# Altium PCB PCB1.pcbdoc
Units mil, origin at the board's own origin, x right, y up, seen from the top; angles counter-clockwise.
Board outline 4170 x 2675 mil, 2 copper layers (Top Layer, Bottom Layer); 21 components, 43 nets, 108 pads, 2 vias.
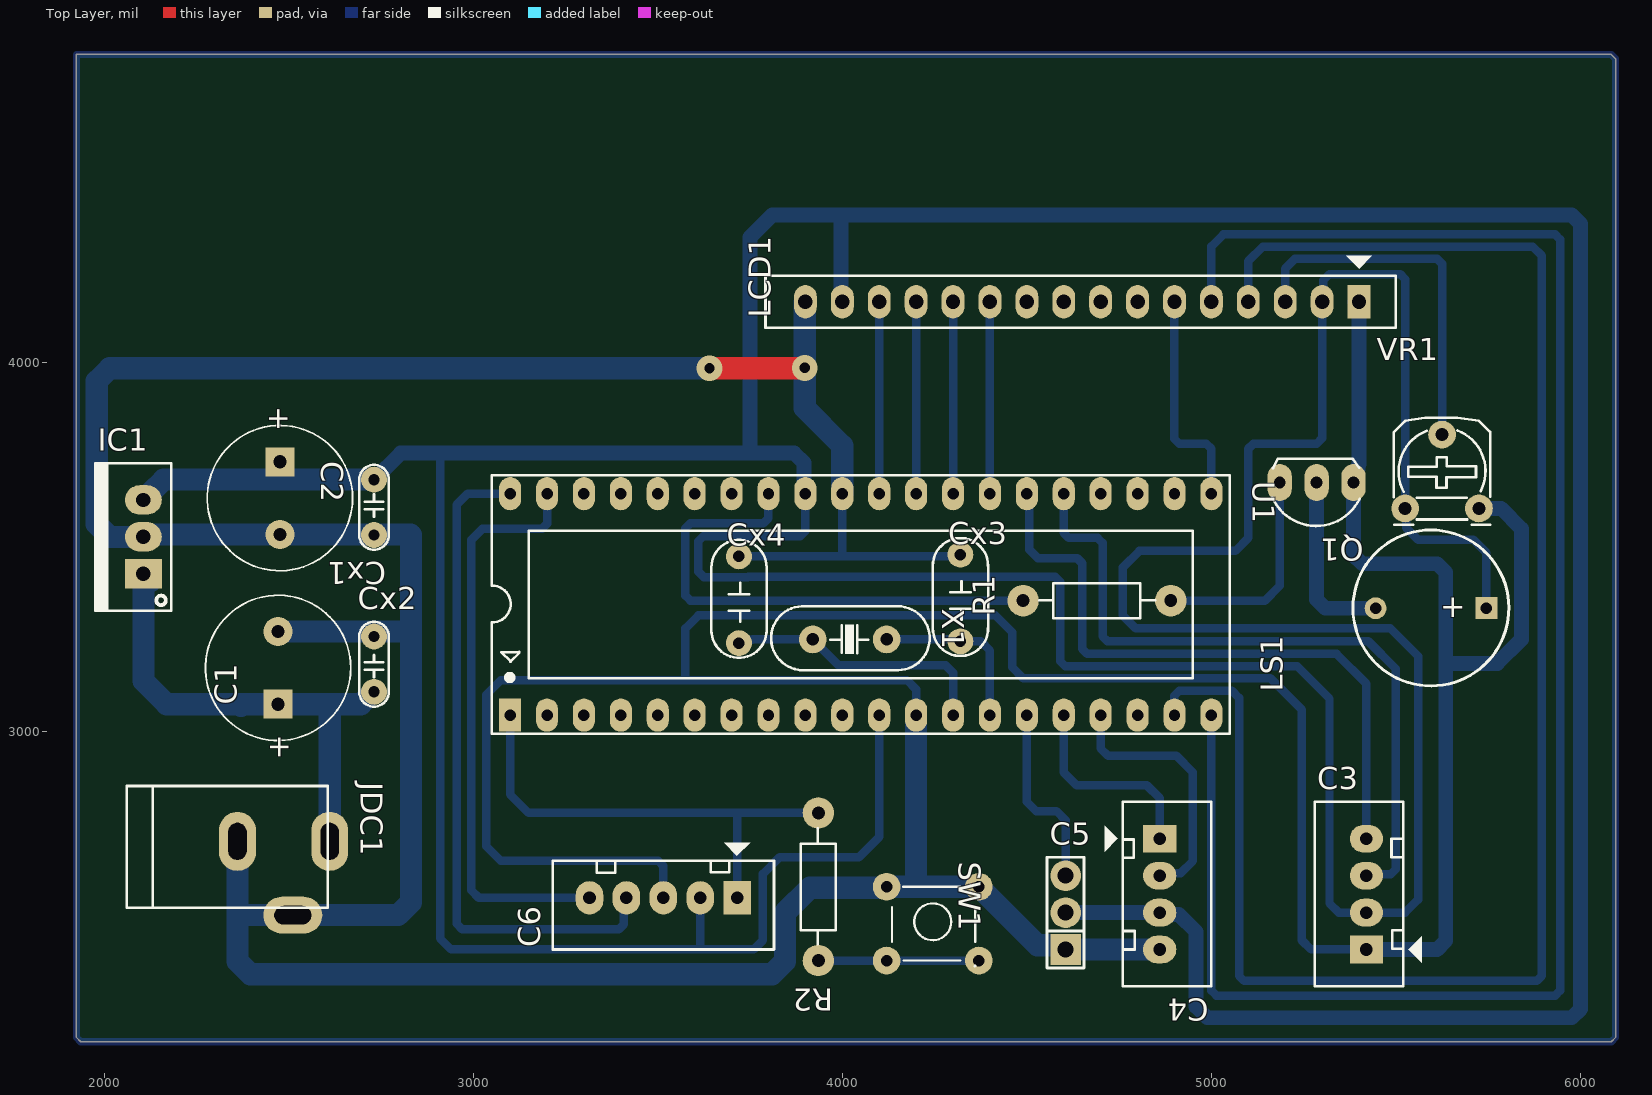
[diagram p0: Top Layer view]
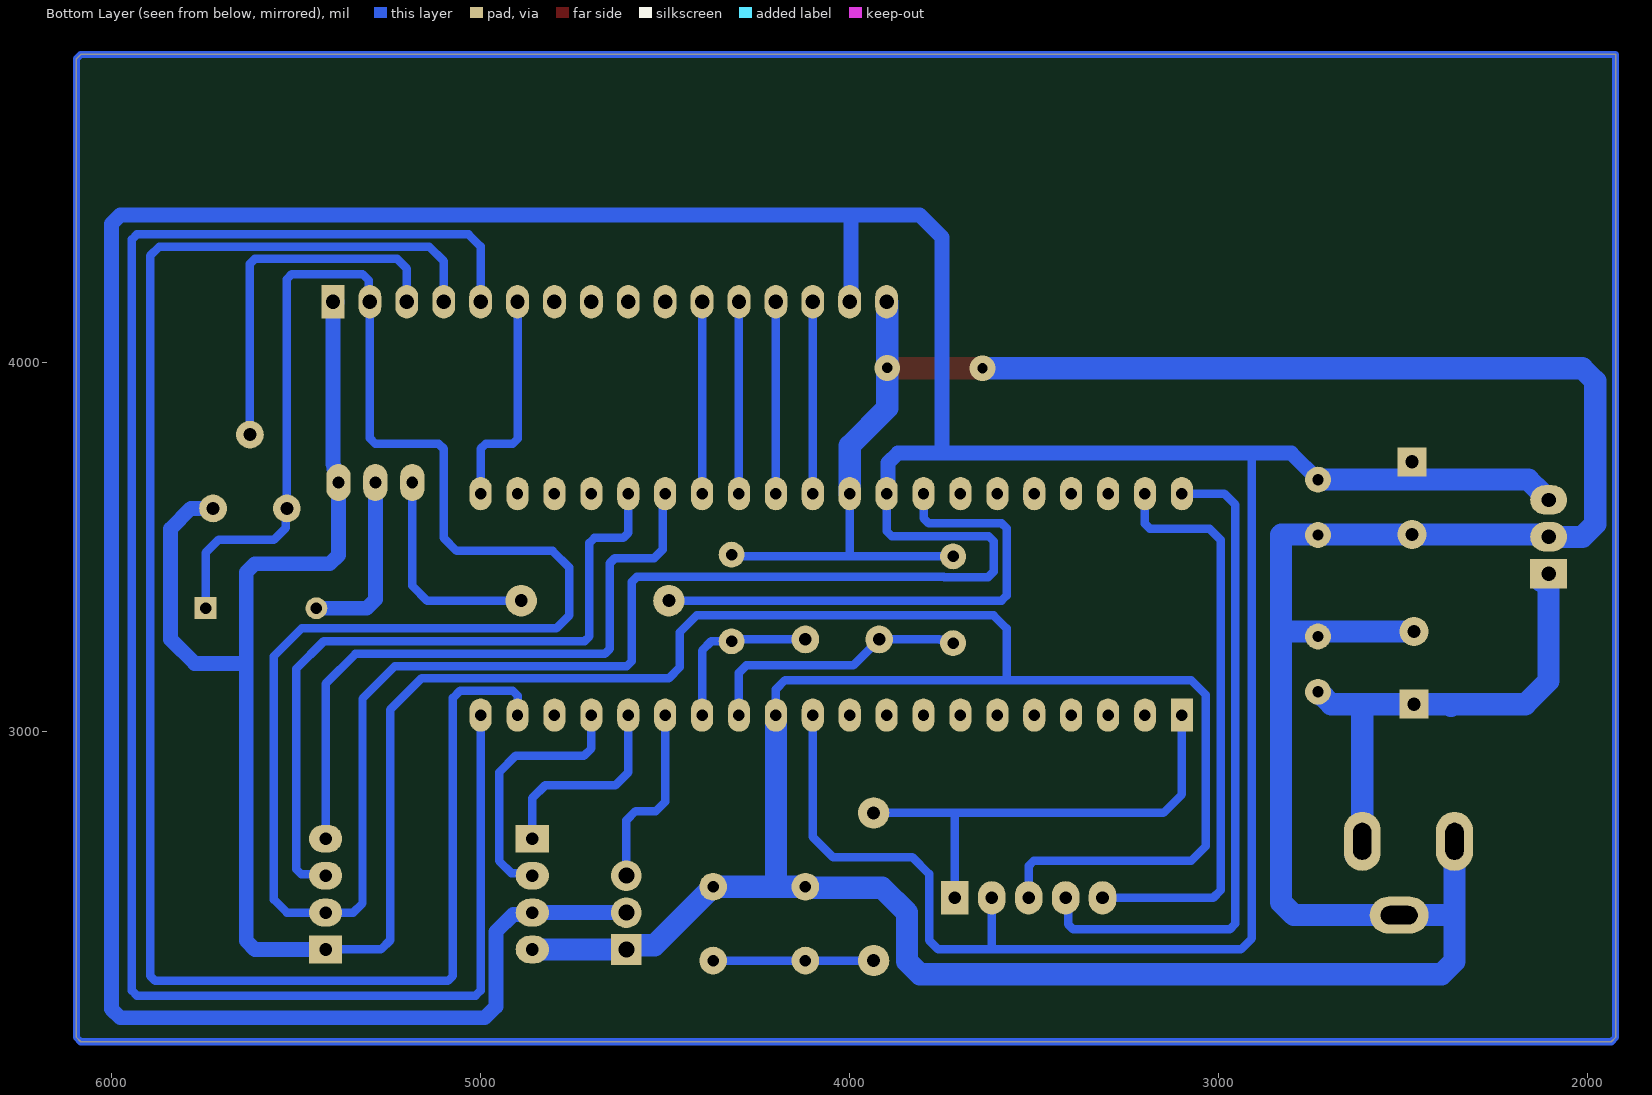
[diagram p1: Bottom Layer view, seen from below]
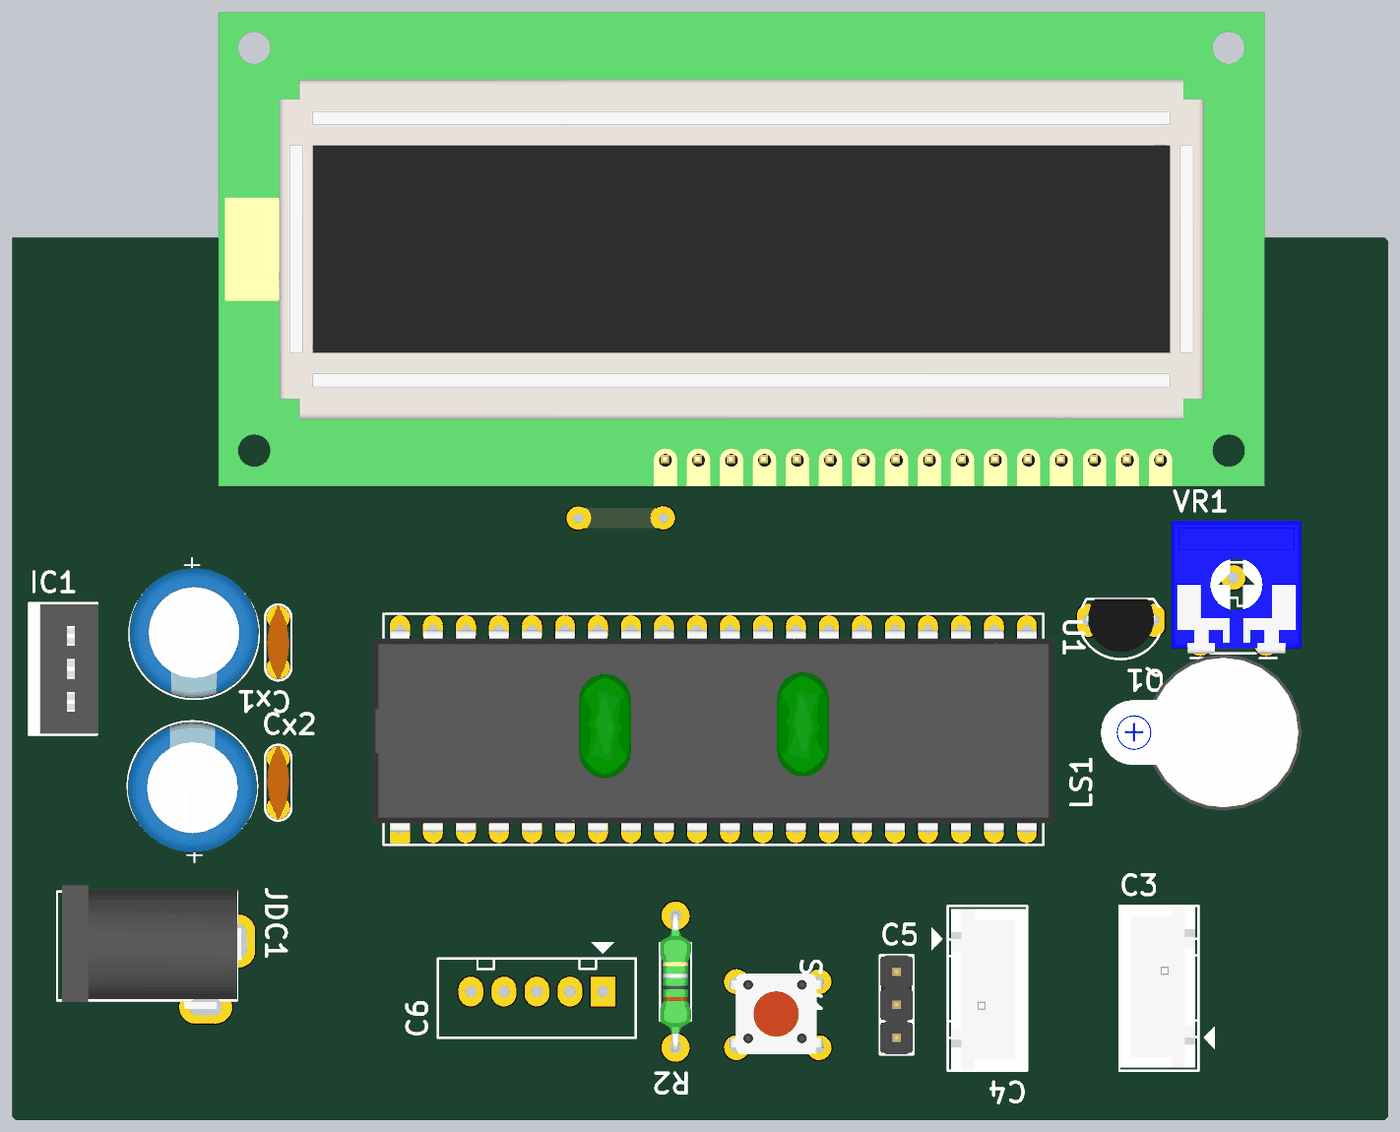
[diagram p2: 3D render of the assembled board from above, using the file's embedded part models]

## Layer stack, top to bottom
Top Solder: solder mask 0.4, Solder Resist, Dk 3.5
Top Layer: signal copper 1.4
Dielectric 1: dielectric 12.6, FR-4, Dk 4.8
Bottom Layer: signal copper 1.4
Bottom Solder: solder mask 0.4, Solder Resist, Dk 3.5

## Board outline
1936.72,2160 1925,2171.72 1925,4835 6083.28,4835 6095,4823.28 6095,2171.72 6083.28,2160

## Design rules (kind name [scope] priority, off if disabled: settings)
Clearance [All] p1: gap=10 ignorepadtopadclearanceinfootprint=FALSE except(0: Arc-Hole Track-Hole SMDPad-Hole THPad-Hole Via-Hole Fill-Hole Poly-Hole Region-Hole Text-Hole)
PolygonConnect [All] p1: connectstyle=Relief reliefconductorwidth=10 reliefentries=4 polygonreliefangle="90 Angle" airgapwidth=10
RoutingVias [All] p1: holewidth=28 width=50 viastyle="Through Hole" minholewidth=28 minwidth=50 maxholewidth=28 maxwidth=50
SolderMaskExpansion [All] p1: expansion=4 istentingtop=FALSE
Width [All] p1: maxlimit=60 minlimit=23 preferedwidth=40
30 further rules are at their usual default settings.

## Classes and differential pairs
component class Duy_Hung: C1 C2 C4 C5 C6 Cx1 Cx2 Cx3 IC1 JDC1 LCD1 LS1 Q1 R1 R2 SW1 U1 VR1 X1

## Components (designator, comment, footprint, x,y, rotation, side; value= is the part's Value field where it differs from the comment)
C1 "CN-ALU-DIP" CA-ALU-10BL 2471.19,3172.99 r90 top value=104
C2 "CN-ALU-DIP" CA-ALU-10BL 2476.19,3632.99 r270 top value=104
C3 "Header4" Header4 5420,2410 r90 top
C4 "Header4" Header4 4860,2710 r270 top
C5 "JP3" JP3-D1T 4605,2410 r90 top
C6 "Header5" Header5 3715,2550 r180 top
Cx1 "100pF" CN1.5 2731.19,3612.99 r270 top value=33pF
Cx2 "100pF" CN1.5 2731.19,3177.99 r90 top value=33pF
Cx3 "100pF" CN2.5 4320,3355 r90 top value=33pF
Cx4 "100pF" CN2.5 3720,3350 r90 top value=33pF
IC1 "LM78xx" TO220-123 2106.19,3427.99 r90 top
JDC1 "Jac DC" DC0 2486.19,2602.99 r0 top
LCD1 "LCD 16x2A" LCD16X2N 5400,4165 r180 top value=LCD16x2A
LS1 "Speaker" SPEAKER 5745,3335 r180 top
Q1 "2SC1815" TO92-123 5285,3675 r180 top value=C1815
R1 "Res" RES-1/4W 4675,3360 r180 top
R2 "Res" RES-1/4W 3930,2565 r270 top
SW1 "SW" SW2-DIP 4120,2580 r0 top value="Button chip 4 pin"
U1 "PIC16F887-PU" DIP40/W0.6 3100,3045 r0 top
VR1 "10K" VR-S2 5525,3605 r0 top value="Volume 50k"
X1 "12Mhz" XT2 4020,3250 r0 top value=4Mhz

## Footprints (in the part's own frame and the unit in brackets; to place one, negate y for a bottom-side part, rotate by r counter-clockwise, add the part's x,y. Pads: shape width x height; smd on the part's side, far side on the other; paste and mask are expansions set on the pad)
CA-ALU-10BL [mm] "Polarized capacitors, Aluminum Electrolytic Capacitors, 2-Leads, Body 10x20x5x0.6"
  rect 2x2 hole 0.9: 1(-2.5,0)
  round 2 hole 0.9: 2(2.5,0)
  silkscreen extent -5,-5 5,5, body extent -5.13,-5 4.88,5, height 16.2
CN1.5 [mil]
  round 70 hole 31: 1(-70,0) 2(80,0)
  silkscreen extent -110,-40 120,40, body extent -110,-33 120,33, height 235
CN2.5 [mil] "Tu pin to pin 250mil"
  round 70 hole 31: 1(-110,0) 2(125,0)
  silkscreen extent -150,-75 170,75, body extent -152,-80 162,77, height 539
DC0 [mil] "Jac DC input"
  oval 100x160 hole 50 slot 100 at 90 deg: 1(125,100) 2(-125,100)
  oval 160x100 hole 50 slot 100 at 0 deg: 3(25,-100)
  silkscreen extent -425,-80 120,250, body extent -410,-105 134,269, height 434
DIP40/W0.6 [mil] "40 PIN, W 600mil, Pin to pin 100mil"
  rect 60x90 hole 31: 1(0,0)
  oval 60x90 hole 31: 2(100,0) 3(200,0) 4(300,0) 5(400,0) 6(500,0) 7(600,0) 8(700,0) 9(800,0) 10(900,0) 11(1000,0) 12(1100,0) 13(1200,0) 14(1300,0) 15(1400,0) 16(1500,0) 17(1600,0) 18(1700,0) 19(1800,0) 20(1900,0) 21(1900,600) 22(1800,600) 23(1700,600) 24(1600,600) 25(1500,600) 26(1400,600) 27(1300,600) 28(1200,600) 29(1100,600) 30(1000,600) 31(900,600) 32(800,600) 33(700,600) 34(600,600) 35(500,600) 36(400,600) 37(300,600) 38(200,600) 39(100,600) 40(0,600)
  silkscreen extent -50,-50 1950,650, body extent -82,-10 1982,600, height 224
Header4 [mil] "CON4"
  rect 75x90 hole 34: 1(0,0)
  oval 75x90 hole 34: 2(100,0) 3(200,0) 4(300,0)
  silkscreen extent -100,-150 400,140, body extent -90,-90 398,136, height 276
Header5 [mil] "CON5"
  rect 75x90 hole 34: 1(0,0)
  oval 75x90 hole 34: 2(100,0) 3(200,0) 4(300,0) 5(400,0)
  silkscreen extent -100,-150 500,140
JP3-D1T [mm] "3 pins, 1 row, straight, gold plating"
  rect 2.108x2.108 hole 1.1: 1(0,0)
  round 2.108 hole 1.1: 2(2.54,0) 3(5.08,0)
  silkscreen extent -1.27,-1.27 6.35,1.27, body extent -1.27,-1.27 6.35,1.27, height 8.54
LCD16X2N [mil] "LCD dipslay 16x2, 16 pin"
  rect 62x90 hole 39: 1(0,0)
  oval 62x90 hole 39: 2(100,0) 3(200,0) 4(300,0) 5(400,0) 6(500,0) 7(600,0) 8(700,0) 9(800,0) 10(900,0) 11(1000,0) 12(1100,0) 13(1200,0) 14(1300,0) 15(1400,0) 16(1500,0)
  silkscreen extent -100,-125 1608,70, body extent -320,-1353 2850,84, height 764
RES-1/4W [mil]
  round 85 hole 35: 1(-215,5) 2(185,5)
  silkscreen extent -173,-42 141,52, body extent -227,-42 197,52, height 95
SPEAKER [mm]
  rect 1.5x1.5 hole 0.8: 1(0,0)
  round 1.5 hole 0.8: 2(7.62,0.013)
  silkscreen extent -1.55,-5.38 9.18,5.36, body extent -2.22,-6 13.24,6, height 4.5
SW2-DIP [mil] "SW button 4pin, 250 x250 mil"
  round 75 hole 31: 1(0,0) 2(0,-200) 3(250,-200) 4(250,0)
  silkscreen extent 15,-215 240,0, body extent -36,-220 276,24, height 276
TO92-123 [mil] "TO-92"
  oval 66x100 hole 32: 1(-100,0) 2(0,0) 3(100,0)
  silkscreen extent -117,-65 120,118, body extent -109,-66 109,95, height 245
TO220-123 [mil] "TO-220 - 1-2-3"
  rect 80x100 hole 39: 1(0,0)
  oval 80x100 hole 39: 2(100,0) 3(200,0)
  silkscreen extent -100,-76 300,130, body extent -95,-80 295,97, height 323
VR-S2 [mil] "Resistor Variable"
  round 75 hole 35: 1(0,0) 2(100,200) 3(200,0)
  silkscreen extent -31,-44 231,246, body extent -87,-30 307,372, height 165
XT2 [mil] "Footpin for Crystal 2 pin"
  round 75 hole 34: 1(-100,0) 2(100,0)
  silkscreen extent -213,-83 217,90, body extent -216,-87 216,90, height 144

## Part data
C1 C2: "Capacitor (Semiconductor SIM Model)", LatestRevisionDate=17-Jul-2002, LatestRevisionNote="Re-released for DXP Platform.", PackageReference=C1206, Publisher="Altium Limited"
C3 C4: "Header IDC, 4 x 1 Pin Vertical 2.54mm Pitch (Non-Boxed, Male)", Manufacturer="W¨¹rth Elektronik eiSos GmbH", partNo=613002143121, ComponentLink1 Description=Manufacturer, ComponentLink1URL=http://www.we-online.com, ComponentLink2 Description=Datasheet, ComponentLink2URL=http://katalog.we-online.de/em/datasheet/6130xx143121.pdf, Created by="Karrer Zheng", Created Date="29 March 2013", NoPins=02
C5: "WR-PHD 2.54 mm Angled Socket Header", Manufacturer="W¨¹rth Elektronik eiSos GmbH", partNo=613003143121, ComponentLink1 Description=Manufacturer, ComponentLink1URL=http://www.we-online.com, ComponentLink2 Description=Datasheet, ComponentLink2URL=http://katalog.we-online.de/em/datasheet/6130xx143121.pdf, Created by="Karrer Zheng", Created Date="29 March 2013", NoPins=03
C6: "Header IDC, 5 x 1 Pin Vertical 2.54mm Pitch (Non-Boxed, Male)", Manufacturer="W¨¹rth Elektronik eiSos GmbH", partNo=613002143121, ComponentLink1 Description=Manufacturer, ComponentLink1URL=http://www.we-online.com, ComponentLink2 Description=Datasheet, ComponentLink2URL=http://katalog.we-online.de/em/datasheet/6130xx143121.pdf, Created by="Karrer Zheng", Created Date="29 March 2013", NoPins=02
Cx1 Cx2 Cx3 Cx4: library part CN
IC1: "Positive Voltage Regulator", ComponentLink1Description="Manufacturer Link", ComponentLink1URL=http://www.st.com/, ComponentLink2Description=Datasheet, ComponentLink2URL=http://www.st.com/stonline/products/literature/ds/2146/l78m05c.pdf, DatasheetVersion=Apr-1994, LatestRevisionDate=17-Jul-2002, LatestRevisionNote="Re-released for DXP Platform.", Note="Tab is connected to pin 3 (GND).", PackageDescription="TO, Thru-Hole, Vertical, Heatsink Mounted; 3 In-Line Leads; Pitch 2.54 mm; Pin sequence 1, 3, 2", PackageReference=ISOWATT220AB, PackageVersion=Jul-1998, Published=24-Aug-2001, Publisher="Altium Limited"
JDC1: library part DCIN, "Jac DC input"
LCD1: library part LCD16x2A, "LCD dipslay 16 char, 2 line"
LS1: "Loudspeaker", LatestRevisionDate=17-Jul-2002, LatestRevisionNote="Re-released for DXP Platform.", PackageReference=PIN2, Published=24-Mar-1999, Publisher="Altium Limited"
Q1: "NPN 600mW, ECB"
R1 R2: Manufacturer="Generic Components", Class=Passive, Published=08/06/2000, Publisher="Altium Hobart Technology Centre", SubClass=R
SW1: library part SW4, "Switch button 4 pin"
U1: "Flash-Based, 8-Bit CMOS Microcontroller with nanoWatt Technology, 8K (x14-Bit words) Program Memory, 624 Bytes Data Memory, 35 I/O pins, 40-Pin PDIP, Standard VDD Range, Extended Temperature", Supplier Part Number 1=PIC16F887-E/P-ND, ComponentLink1Description=Datasheet, ComponentLink1URL=http://ww1.microchip.com/downloads/en/DeviceDoc/41291F.pdf, ComponentLink2Description="Packaging Specification", ComponentLink2URL=http://www.microchip.com/stellent/groups/techpub_sg/documents/packagingspec/en012702.pdf, ComponentLink3Description="Microchip.com Home", ComponentLink3URL=http://www.microchip.com/, DatasheetVersion="revF, Apr-2009", LatestRevisionDate=02-Dec-2009, LatestRevisionNote="Updated datasheet to version revF, Apr-2009.", PackageDescription="40-Lead Plastic Dual In-Line (P) - 600 mil Body [PDIP]", PackageReference=PDIP600-P40, PackageVersion="revBB, Aug-2009", Published=29-Jan-2009, Publisher="Altium Limited", Supplier 1=Digi-Key, Supplier 2=Farnell, Supplier Part Number 2=1703423
VR1: library part VR-S, "Var Resistor"
X1: library part XT2, "Crystal, 32.768 KHz, -40 to 85 degC, 3.2 x 1.5 x 0.9 mm SMD"

## Via types
v1: diameter 70, hole 28, Top Layer to Bottom Layer, 2 vias

## Nets (pads, with @x,y where several pads share a name; then routed paths per layer and width w, separated by ;. In a path a pad name is that pad's centre, name@x,y a point inside that pad or via, vN(x,y) a via of type N, cw(c..) or ccw(c..) an arc to the next point about the centre after c; other vN are vias at no path point)
BUZZER: R1.2 U1.33 | length 1406
  Bottom Layer w23: U1.33 3799.89,3644.89 3799.89,3578.47 3786.42,3565 3588.47,3565 3575,3551.53 3575,3368.97 3588.47,3355.5 4489.5,3355.5 R1.2
GND: C1.2 C2.2 C3.1 C4.4 C5.1 C6.3 Cx1.2 Cx2.2 Cx3.2 Cx4.2 IC1.2 JDC1.2 JDC1.3 LCD1.1 LCD1.16 Q1.1 SW1.1 SW1.4 U1.12 U1.31 VR1.3 | length 17828.7
  Top Layer w60: v1(3640,3985) v1@3894.06,3985
  Bottom Layer w23: C6.3 3515,2636.53 3501.53,2650 3075,2650 3034.68,2690.32 3034.68,3099.68 3075,3140 3575,3140 ; Cx4.2 4005,3475 ; U1.31 4000,3480 4005,3475 ; U1.12 4200,3115 4175,3140 3575,3140 ; Cx3.2 4315,3475 4005,3475 ; C3.1 5270,2410 5245,2435 5245,3060 5160,3145 4490,3145 4460,3175 4460,3270 4415,3315 3610,3315 3575,3280 3575,3140
  Bottom Layer w40: LCD1.1 5400,3725 5398,3723 5398,3712.04 5385,3699.04 Q1.1 5385,3478.43 5408.43,3455 5611.57,3455 5635,3431.57 5635,3185 ; C3.1 5611.57,2410 5635,2433.43 5635,3185 ; VR1.3 5785,3605 5840,3550 5840,3250 5775,3185 5635,3185
  Bottom Layer w60: JDC1.2 2361.19,2505 ; C1.2 2829.62,3271.41 2831.19,3272.99 ; v1(3640,3985) 2015.15,3985 1980,3949.85 1980,3563.13 2015.15,3527.99 2121.61,3527.99 2128.18,3534.56 C2.2 2829.62,3534.56 2831.19,3532.99 2831.19,3272.99 ; LCD1.16 3898.28,4163.28 3898.28,3876.72 4000,3775 U1.31 ; U1.12 4200,2590 4210,2580 ; C4.4 C5.1 4593.5,2421.5 4528.5,2421.5 SW1.4 4210,2580 ; LCD1.1@5399,4164 LCD1.1 ; 2361.19,2505 2363.21,2502.99 JDC1.3 2796.05,2502.99 2831.19,2538.13 2831.19,3272.99 ; 2361.19,2505 2361.19,2378.13 2396.34,2342.99 3809.85,2342.99 3845,2378.13 3845,2510 3912.13,2577.13 4117.13,2577.13 SW1.1 4210,2580
  other v1: 3898.28,3985.78
NetC1_1: C1.1 Cx2.1 IC1.1 JDC1.1 | length 1413.2
  Bottom Layer w60: IC1.1@2126.19,3407.99 2126.19,3417.99 2116.19,3427.99 IC1.1 2106.19,3137.99 2169.62,3074.56 2366.19,3074.56 ; 2371.19,3069.56 2366.19,3074.56 ; JDC1.1@2629.67,2665.33 2611.19,2683.81 JDC1.1 2611.19,3074.56 ; Cx2.1 2728.49,3107.99 2695.06,3074.56 2611.19,3074.56 ; 2366.19,3074.56 C1.1 2611.19,3074.56
NetLCD1_3: LCD1.3 VR1.2 | length 994.6
  Bottom Layer w23: LCD1.3 5200,4255 5226.5,4281.5 5611.53,4281.5 5625,4268.03 VR1.2
NetLS1_2: LS1.2 Q1.2 | length 486.8
  Bottom Layer w40: Q1.2 5285,3357.93 5308.43,3334.5 LS1.2
NetQ1_3: Q1.3 R1.1 | length 591.6
  Bottom Layer w23: R1.1 5145,3355 5185,3395 Q1.3
NetR2_2: R2.2 SW1.2 SW1.3 | length 435
  Bottom Layer w23: R2.2 SW1.3
OSC1: Cx4.1 U1.13 X1.1 | length 736.4
  Bottom Layer w23: Cx4.1 3728.99,3248.99 3755.97,3248.99 3756.97,3250 X1.1 3990,3180 4280,3180 4300,3160 U1.13
OSC2: Cx3.1 U1.14 X1.2 | length 467.4
  Bottom Layer w23: X1.2 4315,3250 Cx3.1 4375,3245 4400,3220 U1.14
PGC: C6.5 U1.39 | length 1582.8
  Bottom Layer w23: U1.39 3200,3563.47 3186.53,3550 3025,3550 2995,3520 2995,2570 3015,2550 C6.5
PGD: C6.4 U1.40 | length 1831.8
  Bottom Layer w23: U1.40 2985,3645 2955,3615 2955,2480 2970,2465 3394.73,2465 3408.2,2478.47 3408.2,2543.2 C6.4
RA0: U1.2
RA1: U1.3
RA2: U1.4
RA3: U1.5
RA4: U1.6
RA5: U1.7
RB1: U1.34
RB2: U1.35
RB3: U1.36
RB4: U1.37
RB5: U1.38
RC0: C5.3 U1.15 | length 510.7
  Bottom Layer w23: U1.15 4500,2810 4525,2785 4580,2785 4605,2760 C5.3
RC1: C4.1 U1.16 | length 554
  Bottom Layer w23: U1.16 4600,2890 4635,2855 4825,2855 4860,2820 C4.1
RC2: C4.2 U1.17 | length 713.5
  Bottom Layer w23: U1.17 4700,2955 4720,2935 4905,2935 4950,2890 4950,2650 4916.66,2616.66 4866.66,2616.66 C4.2
RC3: U1.18
RC4: U1.23
RC5: U1.24
RC6: C3.3 U1.25 | length 1937.1
  Bottom Layer w23: U1.25 4600,3538.47 4613.47,3525 4691.53,3525 4705,3511.53 4705,3258.47 4718.47,3245 5425,3245 5500,3170 5500,2627.63 5486.53,2614.16 5424.16,2614.16 C3.3
RC7: C3.4 U1.26 | length 1774.2
  Bottom Layer w23: U1.26 4507.08,3637.92 4507.08,3492.92 4530,3470 4636.53,3470 4650,3456.53 4650,3224.47 4663.47,3211 5339,3211 5420,3130 C3.4
RD0: LCD1.4 U1.19 | length 4709.1
  Bottom Layer w23: U1.19 4900,3098.03 4913.47,3111.5 5055.03,3111.5 5075,3091.53 5075,2338.47 5088.47,2325 5881.53,2325 5895,2338.47 5895,4290 5870.5,4314.5 5139.5,4314.5 5100,4275 LCD1.4
RD1: LCD1.5 U1.20 | length 4852.3
  Bottom Layer w23: U1.20 5000,2298.47 5013.47,2285 5931.53,2285 5945,2298.47 5945,4334.03 5931.53,4347.5 5032.5,4347.5 5000,4315 LCD1.5
RD2: LCD1.6 U1.21 | length 604.2
  Bottom Layer w23: LCD1.6 4900,3793.47 4913.47,3780 4986.53,3780 5000,3766.53 U1.21
RD3: U1.22
RD4: LCD1.11 U1.27 | length 520
  Bottom Layer w23: U1.27 LCD1.11
RD5: LCD1.12 U1.28 | length 520
  Bottom Layer w23: U1.28 LCD1.12
RD6: LCD1.13 U1.29 | length 520
  Bottom Layer w23: U1.29 LCD1.13
RD7: LCD1.14 U1.30 | length 520
  Bottom Layer w23: U1.30 LCD1.14
RE0: U1.8
RE1: U1.9
RE2: U1.10
RST: C6.1 R2.1 U1.1 | length 1300.7
  Bottom Layer w23: U1.1 3100,2830 3150,2780 3715,2780 ; C6.1 3715,2780 ; R2.1 3715,2780
VCC: C2.1 C3.2 C4.3 C5.2 C6.2 Cx1.1 IC1.3 LCD1.2 LCD1.15 LS1.1 U1.11 U1.32 VR1.1 | length 19571.1
  Bottom Layer w23: 2915,3755 2910,3750 2910,2440 2940,2410 3615,2410 ; C6.2 3615,2410 ; U1.32 3900,3543.47 3886.53,3530 3623.47,3530 3610,3516.53 3610,3433.47 3624.97,3418.5 3743.4,3418.5 3744.9,3420 4576.53,3420 4590,3406.53 4590,3191.47 4603.47,3178 5232,3178 5320,3090 5320,2535 5345,2510 C3.2 5525,2510 5560,2545 5560,3205 5485,3280 4795,3280 4760,3315 4760,3445 4805,3490 5065,3490 5100,3525 5100,3766.53 5113.47,3780 5285,3780 5300,3795 LCD1.2 5302.82,4167.82 5302.82,4222.82 5320,4240 5511.53,4240 5525,4226.53 VR1.1 5527.91,3602.09 5527.91,3552.09 5560,3520 5710,3520 5745,3485 LS1.1 ; U1.11 4100,2715 4045,2660 3830,2660 3785,2615 3785,2435 3760,2410 3615,2410
  Bottom Layer w40: Cx1.1 2803.21,3755 2915,3755 3750,3755 ; U1.32 3896.17,3648.83 3896.17,3728.83 3870,3755 3750,3755 ; LCD1.15 3996.15,4168.85 3996.15,4400 ; C5.2 C4.3 4865.19,2504.81 4911.57,2504.81 4958.5,2457.88 4958.5,2255 4988.5,2225 5976.57,2225 6000,2248.43 6000,4376.57 5976.57,4400 3996.15,4400 ; 3750,3755 3750,4340 3810,4400 3996.15,4400
  Bottom Layer w60: IC1.3 2110.78,3627.99 2126.19,3643.4 2126.19,3647.84 2161.34,3682.99 2470,3682.99 ; C2.1 2470,3725.22 2470,3682.99 ; Cx1.1 2470,3682.99
pads on no net: LCD1.7 LCD1.8 LCD1.9 LCD1.10
copper on no net: | length 13669.4
  Bottom Layer w20: 1925,2171.72 1936.72,2160 6083.28,2160 6095,2171.72 6095,4823.28 6083.28,4835 1925,4835 1925,2171.72

## Text inside footprints (layer, text, board x,y; h text height)
C1: Top Overlay "+" at 2500.21,2923.97 h59.06 r90
C2: Top Overlay "+" at 2447.18,3882 h59.06 r270
LS1: Top Overlay "+" at 5689.5,3363 h60 r180